# Altium PCB bmsSlave.PcbDoc (part 2 of 2)
Units mil, origin at the board's own origin, x right, y up, seen from the top; angles counter-clockwise.
Board outline 5031.62 x 7216.44 mil, 2 copper layers (Top Layer, Bottom Layer); 233 components, 161 nets, 594 pads, 117 vias.
Unrouted connection lines stored in the file: 5.
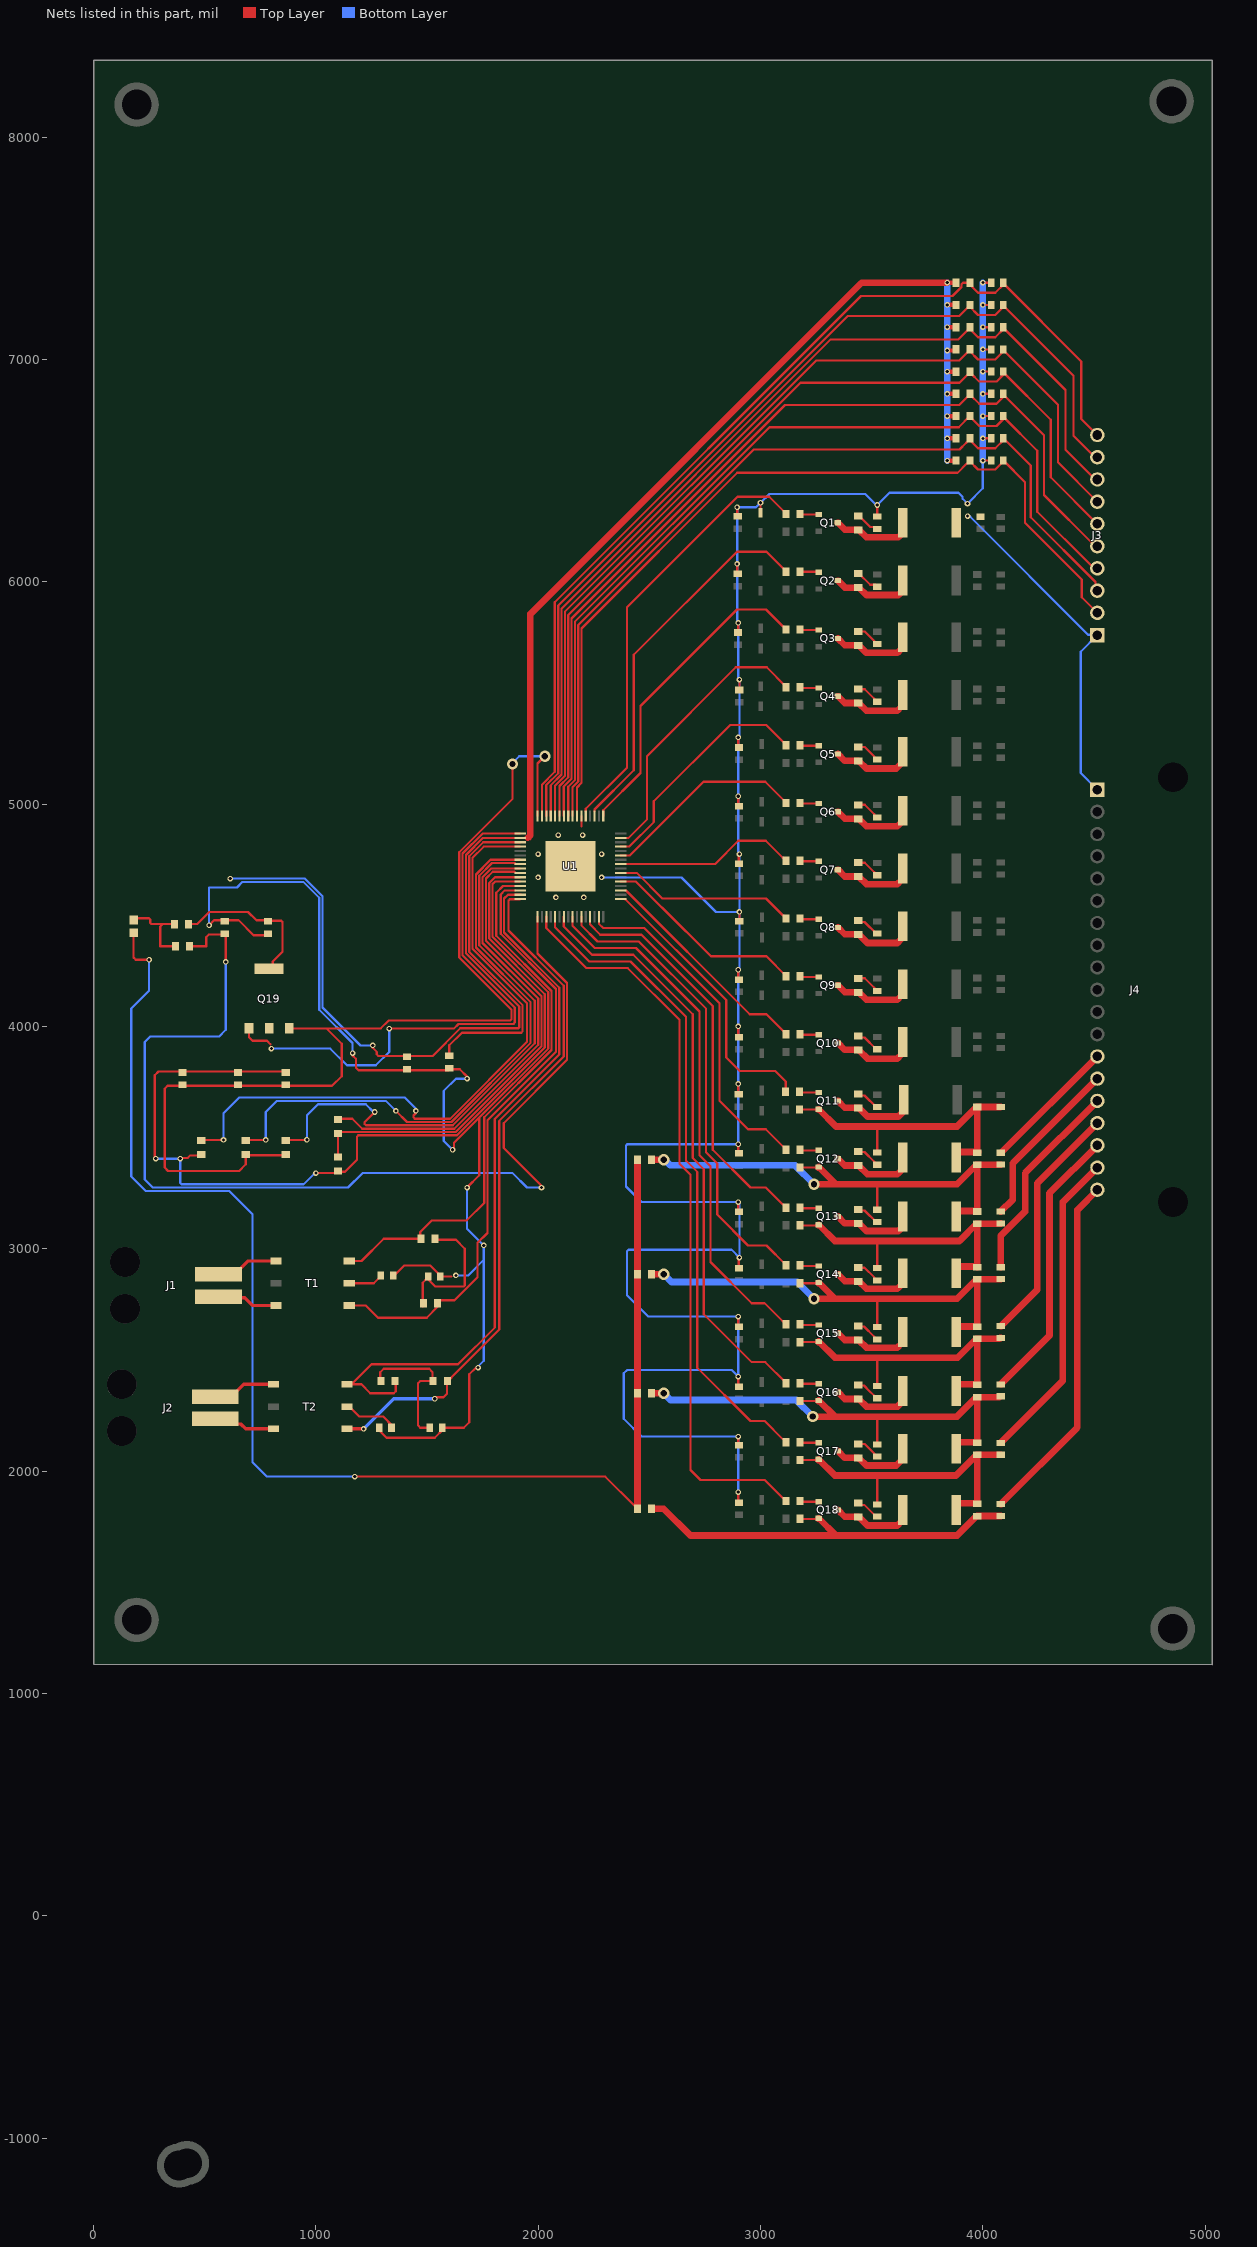
[diagram p2: the nets of this part, all layers, seen from the top]

## Via types
v1: diameter 25, hole 14, Top Layer to Bottom Layer, tented both sides, 109 vias
v2: diameter 50, hole 28, Top Layer to Bottom Layer, tented both sides, 8 vias

## Nets (pads, with @x,y where several pads share a name; then routed paths per layer and width w, separated by ;. In a path a pad name is that pad's centre, name@x,y a point inside that pad or via, vN(x,y) a via of type N, cw(c..) or ccw(c..) an arc to the next point about the centre after c; other vN are vias at no path point) (continued)
Cell11_F: C30.1 C34.2 F11.2 LED12.1 Q11.2 R65.2 R67.2 | length 1383.5
  Top Layer w10: R67.2@3176.29,3626.48 Q11.2@3260.57,3626.48 ; LED12.1@3525,3432.56 3525,3550
  Top Layer w30: Q11.2@3260.57,3626.48 Q11.2@3261.69,3627.6 3339.29,3550 3525,3550 3884.29,3550 3971.73,3637.44 C34.2@3975,3637.44 ; R65.2@3890.87,3435 C30.1@3979.13,3435 ; C30.1@3975,3432.56 C34.2@3975,3637.44 ; F11.2@4080,3638.25 4079.43,3637.68 3975.24,3637.68 C34.2@3975,3637.44
Cell12: F12.1 J4.13 | length 614.8
  Top Layer w30: F12.1@4080,3431.75 4082.25,3431.75 4515,3864.5 J4.13@4515,3865
Cell12_F: C25.1 C30.2 F12.2 LED13.1 Q12.2 R56.2 R59.2 R91.1 | length 2261.2
  Top Layer w10: R59.2@3176.5,3365 Q12.2@3259.09,3365 ; LED13.1@3525,3175.12 3525,3290
  Top Layer w30: R91.1@2510,3400 v2(2565,3400) ; v2(3240,3290) 3339.29,3290 ; Q12.2@3259.09,3365 Q12.2@3261.69,3367.6 3339.29,3290 ; R56.2@3885.87,3170 C25.1@3974.13,3170 ; C25.1@3975,3167.56 C30.2@3975,3377.44 ; F12.2@4080,3378.25 4079.43,3377.68 3975.24,3377.68 C30.2@3975,3377.44 ; 3339.29,3290 3525,3290 3884.29,3290 3971.73,3377.44 C30.2@3975,3377.44
  Bottom Layer w30: v2(2565,3400) 2570,3400 2595,3375 3155,3375 v2(3240,3290)
Cell13: F13.1 J4.14 | length 778.4
  Top Layer w30: F13.1@4080,3166.75 4135,3221.75 4135,3385 J4.14@4515,3765
Cell13_F: C16.1 C25.2 F13.2 LED14.1 Q13.2 R41.2 R45.2 | length 1372.7
  Top Layer w10: R45.2@3176.5,3105 Q13.2@3259.09,3105 ; LED14.1@3525,2912.56 3525,3035
  Top Layer w30: Q13.2@3259.09,3105 Q13.2@3261.69,3107.6 3334.29,3035 3525,3035 3894.29,3035 3971.73,3112.44 C25.2@3975,3112.44 ; R41.2@3885.87,2920 C16.1@3974.13,2920 ; C16.1@3975,2917.56 C25.2@3975,3112.44 ; F13.2@4080,3113.25 4079.43,3112.68 3975.24,3112.68 C25.2@3975,3112.44
Cell14: F14.1 J4.15 | length 928.4
  Top Layer w30: F14.1@4080,2916.75 4080,3056.96 4190,3166.96 4190,3340 J4.15@4515,3665
Cell14_F: C6.1 C16.2 F14.2 LED15.1 Q14.2 R24.2 R28.2 R90.1 | length 2269.2
  Top Layer w10: R28.2@3176.5,2845 Q14.2@3259.09,2845 ; LED15.1@3525,2647.56 3525,2775
  Top Layer w30: R90.1@2510,2885 v2(2565,2885) ; v2(3240,2775) 3334.29,2775 ; Q14.2@3259.09,2845 Q14.2@3261.69,2847.6 3334.29,2775 ; R24.2@3880.87,2650 C6.1@3969.13,2650 ; C6.1@3975,2650 C16.2@3975,2862.44 ; F14.2@4080,2863.25 4079.43,2862.68 3975.24,2862.68 C16.2@3975,2862.44 ; 3334.29,2775 3525,2775 3884.29,2775 3971.73,2862.44 C16.2@3975,2862.44
  Bottom Layer w30: v2(2565,2885) 2600,2850 3165,2850 v2(3240,2775)
Cell15: F15.1 J4.16 | length 1094.8
  Top Layer w30: F15.1@4080,2651.75 4082.25,2651.75 4083.5,2653 4083.5,2655.25 4245,2816.75 4245,3295 J4.16@4515,3565
Cell15_F: C6.2 C22.1 F15.2 LED16.1 Q15.2 R6.2 R57.2 | length 1394.2
  Top Layer w10: R6.2@3176.5,2580 Q15.2@3259.09,2580 ; LED16.1@3525,2382.56 3525,2510
  Top Layer w30: Q15.2@3259.09,2580 Q15.2@3261.69,2582.6 3334.29,2510 3525,2510 3886.85,2510 3971.73,2594.88 C6.2@3975,2594.88 ; R57.2@3875.87,2390 C22.1@3964.13,2390 ; C22.1@3975,2387.56 C6.2@3975,2594.88 ; F15.2@4080,2598.25 4077.75,2598.25 4074.38,2594.88 C6.2@3975,2594.88
Cell16: F16.1 J4.17 | length 1256.5
  Top Layer w30: F16.1@4080,2390 4082.25,2390 4083.5,2391.25 4083.5,2393.5 4300,2610 4300,3250 J4.17@4515,3465
Cell16_F: C13.1 C22.2 F16.2 LED17.1 Q16.2 R42.2 R47.2 R87.1 | length 2258.4
  Top Layer w10: R47.2@3176.5,2315 Q16.2@3259.09,2315 ; LED17.1@3525,2120.12 3525,2245
  Top Layer w30: R87.1@2510,2350 v2(2565,2350) ; v2(3235,2245) 3334.29,2245 ; Q16.2@3259.09,2315 Q16.2@3261.69,2317.6 3334.29,2245 ; R42.2@3880.87,2130 C13.1@3969.13,2130 ; C13.1@3975,2127.56 C22.2@3975,2332.44 ; F16.2@4080,2336.5 4077.75,2336.5 4073.69,2332.44 C22.2@3975,2332.44 ; 3334.29,2245 3525,2245 3884.29,2245 3971.73,2332.44 C22.2@3975,2332.44
  Bottom Layer w30: v2(2565,2350) 2595,2320 3160,2320 v2(3235,2245)
Cell17: F17.1 J4.18 | length 1419.8
  Top Layer w30: F17.1@4080,2126.75 4082.25,2126.75 4083.5,2128 4083.5,2130.25 4360,2406.75 4360,3210 J4.18@4515,3365
Cell17_F: C7.1 C13.2 F17.2 LED18.1 Q17.2 R25.2 R30.2 | length 1411.4
  Top Layer w10: R30.2@3176.5,2050 Q17.2@3259.09,2050 ; LED18.1@3525,1850 3525,1980
  Top Layer w30: Q17.2@3259.09,2050 Q17.2@3261.69,2052.6 3334.29,1980 3525,1980 3879.29,1980 3971.73,2072.44 C13.2@3975,2072.44 ; R25.2@3885.87,1855 C7.1@3974.13,1855 ; C7.1@3975,1852.56 C13.2@3975,2072.44 ; F17.2@4080,2073.25 4079.43,2072.68 3975.24,2072.68 C13.2@3975,2072.44
Cell18: F18.1 J4.19 | length 1594.8
  Top Layer w30: F18.1@4080,1851.75 4082.25,1851.75 4083.5,1853 4083.5,1855.25 4425,2196.75 4425,3175 J4.19@4515,3265
Cell18_F: C7.2 F18.2 Q18.2 R7.2 R84.1 | length 1852.3
  Top Layer w10: R7.2@3176.5,1785 Q18.2@3259.09,1785
  Top Layer w30: R84.1@2510,1830 2565,1830 2685,1710 3339.29,1710 ; Q18.2@3259.09,1785 Q18.2@3261.69,1787.6 3339.29,1710 ; F18.2@4080,1798.25 4079.43,1797.68 3975.24,1797.68 C7.2@3975,1797.44 3971.73,1797.44 3884.29,1710 3339.29,1710
GND: C0.1 C8.1 C9.1 C10.1 C11.1 C12.1 C15.1 C17.1 C18.1 C19.1 C20.1 C21.1 C26.1 C27.1 C28.1 C31.1 C32.1 C35.1 C36.1 C37.2 C38.2 C39.2 C40.2 C41.2 C42.2 C43.2 C44.2 C45.2 C46.2 C47.2 C48.2 C49.2 C50.2 C51.2 C52.2 C53.1 C54.2 C55.1 C56.2 J3.1 J4.1 LED1.1 R46.2 R86.2 R89.1 U1.38 U1.59 U1.60 U1.65 Z1.2 | length 23944.4
  Top Layer w10: v1(280,3405) 275,3410 275,3780 292.28,3797.28 C50.2@865,3797.28 ; v1(390,3405) 393.28,3408.28 423.28,3408.28 434.92,3419.92 R89.1@485,3419.92 ; v1(520,4455) 542.28,4477.28 652.72,4477.28 720,4410 782.28,4410 C38.2@785,4412.72 ; v1(1000,3340) 1094.03,3340 1100,3345.97 1130.97,3345.97 1185,3400 1185,3504.14 1190.86,3510 1635,3510 2030,3905 2030,4145 1780,4395 1780,4645 1805.79,4670.79 U1.59@1918.62,4670.79 ; v1(1165,3880) 1165,3869.18 1180,3854.18 1180,3815 1192.28,3802.72 1595,3802.72 1600,3807.72 1647.28,3807.72 v1@1680,3775 ; C56.2@1280.43,2195 1280.43,2187.13 1317.56,2150 1535.16,2150 1572.28,2187.13 1572.28,2195 1665,2195 1690,2220 1690,2435 1720,2465 v1(1730,2465) ; C54.2@1352.28,2880 1397.28,2925 1514.57,2925 1564.57,2875 1610,2875 ; v1(1615,3445) 1620.78,3450.78 1620.78,3475.78 1735,3590 ; v1(1680,3275) 1735,3330 1735,3590 ; U1.60@1918.62,4651.1 1806.1,4651.1 1795,4640 1795,4403.34 2045,4153.34 2045,3900 1735,3590 ; U1.38@2194.21,4946.38 2194.21,4900.79 2195,4900 ; v1(2895,6080) 2895,6044.57 C18.1@2897.28,6042.28 ; C21.1@2895,6303.71 v1(2895,6335) ; C15.1@2897.9,5773.16 2900,5775.26 v1(2900,5815) ; v1(2899.79,3741.48) 2899.79,3701.04 C36.1@2902.08,3698.76 ; v1(2900,1905) 2900,1867.6 2900.04,1867.56 C11.1@2902.28,1867.56 ; v1@2900,2160 v1(2900,2155) 2900,2124.84 C20.1@2902.28,2122.56 ; v1(2900,2425) 2900,2384.84 C28.1@2902.28,2382.56 ; v1(2900,2695) 2900,2654.84 C10.1@2902.28,2652.56 ; v1(2900,3210) 2900,3174.84 C27.1@2902.28,3172.56 ; v1(2900,3470) 2900,3438.99 2901.71,3437.28 C32.1@2902.28,3437.28 ; v1(2900,4000) 2900,3959.57 C9.1@2902.28,3957.28 ; v1(2900,4255) 2900,4219.57 C17.1@2902.28,4217.28 ; v1(2900,5035) 2900,4999.57 C35.1@2902.28,4997.28 ; v1(2900,5300) 2900,5264.27 2901.98,5262.28 C8.1@2902.28,5262.28 ; C19.1@2902.28,2922.56 2902.28,2957.28 v1(2905,2960) ; C31.1@2902.28,4742.01 2902.28,4772.28 v1(2905,4775) ; C12.1@2903.78,5522.28 2904.41,5522.28 2905,5522.88 v1(2905,5560) ; v1(2905,4515) 2905,4483.43 2906.15,4482.28 C26.1@2909.45,4482.28 ; Z1.2@3000,6323.71 v1(3000,6355) ; LED1.1@3525,6298.71 v1(3525,6345) ; v1(4000,6545) C47.2@4031.29,6545 ; v1(4000,6645) C46.2@4031.29,6645 ; v1(4000,6745) C45.2@4031.29,6745 ; v1(4000,6845) C44.2@4031.29,6845 ; v1(4000,6945) C43.2@4031.29,6945 ; v1(4000,7045) C42.2@4031.29,7045 ; v1(4000,7145) C41.2@4031.29,7145 ; v1(4000,7245) C40.2@4031.29,7245 ; v1(4000,7345) C39.2@4031.29,7345
  Bottom Layer w10: v1(280,3405) 375,3405 ; v1(390,3405) 390,3295.86 395.86,3290 945,3290 v1@990,3335 ; v1(520,4455) 520,4625 645,4625 670,4650 943.79,4650 1015,4578.79 1015,4075 1165,3925 v1(1165,3880) ; 1604.74,3455.26 1575,3485 1575,3710 1630,3765 v1(1680,3765) ; v1(1630,2880) 1685,2880 1755,2950 ; v1@1680,3280 1680,3090 v1(1755,3015) 1755,2950 ; v1(1730,2465) 1730,2471.57 1755,2496.57 1755,2950 ; v1@1755,3010 1755,2950 ; v1(2285,4670) 2645,4670 2800,4515 v1(2905,4515) ; v1(2900,1905) v1(2900,2155) 2465,2155 2385,2235 2385,2440 2400,2455 2870,2455 v1(2900,2425) v1(2900,2695) 2495,2695 2400,2790 2400,2989.14 2405.86,2995 2870,2995 v1(2905,2960) 2905,3200.94 2900,3205.94 v1(2900,3210) 2465,3210 2395,3280 2395,3464.14 2400.86,3470 v1(2900,3470) 2899.9,3470.1 2899.9,3741.37 v1(2899.79,3741.48) 2899.9,3741.58 2899.9,3999.9 v1(2900,4000) v1(2900,4255) 2900,4259.06 2905,4264.06 v1(2905,4515) ; v1(3931.11,6294.88) 3933.98,6292.01 3942.99,6292.01 4473.38,5761.62 4513.38,5761.62 J3.1@4515,5760 4440,5685 4440,5140 J4.1@4515,5065 ; v1(4000,6545) 4000,6420.11 v1(3930.88,6350.98) 3909,6372.86 3909,6381 3890,6400 3580,6400 v1(3525,6345) 3520.94,6345 3470.94,6395 3040,6395 v1(3000,6355) 2980,6335 v1(2895,6335) v1(2895,6080) 2895,5824.06 2900,5819.06 v1(2900,5815) 2900,5569.06 2905,5564.06 v1(2905,5560) 2905,5309.06 2900,5304.06 v1(2900,5300) v1(2900,5035) 2900,4784.06 2905,4779.06 v1(2905,4775) v1(2905,4515)
  Bottom Layer w30: v1(4000,6545) v1(4000,6645) v1(4000,6745) v1(4000,6845) v1(4000,6945) v1(4000,7045) v1(4000,7145) v1(4000,7245) v1(4000,7345)
  other v1: 2080,4580 2205,4580 2000,4670 2000,4775 2285,4775 2090,4860 2200,4860
GPIO1: C47.1 J3.2 R83.1 U1.39 | length 3958.2
  Top Layer w10: U1.39@2174.53,4946.38 2174.53,5074.82 2195,5095.29 2195,5790 2895,6490 3886.5,6490 3927.8,6531.3 3930.75,6531.3 R83.1@3941.5,6542.05 ; R83.1@3941.5,6545 R83.1@3941.5,6542.05 ; J3.2@4515,5860 4445,5930 4445,6010 4190,6265 4190,6447.56 C47.1@4092.56,6545 4092.56,6541.26 4056.3,6505 3978.54,6505 R83.1@3941.5,6542.05
GPIO2: C46.1 J3.3 R82.1 U1.40 | length 4030.7
  Top Layer w10: U1.40@2154.84,4946.38 2154.84,5076.35 2180,5101.51 2180,5805 2970,6595 3895,6595 3925,6625 3925,6625.55 3941.5,6642.05 R82.1@3941.5,6645 ; R82.1@3941.5,6637.05 3978.54,6600 4056.3,6600 4092.56,6636.26 C46.1@4092.56,6645 4215,6522.56 4215,6290 4506.43,5998.57 4506.43,5968.57 J3.3@4515,5960
GPIO3: C45.1 J3.4 R81.1 U1.41 | length 4095.8
  Top Layer w10: U1.41@2135.16,4946.38 2135.16,5077.88 2165,5107.72 2165,5820 3040,6695 3891.5,6695 R81.1@3941.5,6745 ; R81.1@3946.5,6737.05 3983.54,6700 4061.3,6700 C45.1@4097.56,6736.26 ; C45.1@4092.56,6745 4092.56,6741.26 C45.1@4097.56,6736.26 ; J3.4@4515,6060 4500.13,6060 4484.05,6076.07 4483.93,6076.07 4245,6315 4245,6588.82 C45.1@4097.56,6736.26
GPIO4: C44.1 J3.5 R80.1 U1.42 | length 4161.8
  Top Layer w10: U1.42@2115.47,4946.38 2115.47,5079.41 2150,5113.93 2150,5835 3110,6795 3894.45,6795 3941.5,6842.05 R80.1@3941.5,6845 ; R80.1@3946.5,6837.05 3983.54,6800 4061.3,6800 C44.1@4097.56,6836.26 ; C44.1@4092.56,6845 4092.56,6841.26 C44.1@4097.56,6836.26 ; J3.5@4515,6160 4505,6160 4274.78,6390.22 4274.78,6659.04 C44.1@4097.56,6836.26
GPIO5: C43.1 J3.6 R79.1 U1.43 | length 4223.4
  Top Layer w10: U1.43@2095.79,4946.38 2095.79,5080.93 2135,5120.15 2135,5850 3180,6895 3895,6895 3925,6925 3925,6925.55 3941.5,6942.05 R79.1@3941.5,6945 ; R79.1@3946.5,6937.05 3983.54,6900 4061.3,6900 C43.1@4097.56,6936.26 ; C43.1@4092.56,6945 4092.56,6941.26 C43.1@4097.56,6936.26 ; J3.6@4515,6260 4305.52,6469.48 4305.52,6728.3 C43.1@4097.56,6936.26
GPIO6: C42.1 J3.7 R78.1 U1.44 | length 4286.2
  Top Layer w10: U1.44@2076.1,4946.38 2076.1,5082.46 2120,5126.36 2120,5864.53 3250.47,6995 3894.45,6995 3941.5,7042.05 R78.1@3941.5,7045 ; R78.1@3941.5,7037.05 3978.54,7000 4056.3,7000 C42.1@4092.56,7036.26 ; C42.1@4092.56,7041.26 4338.24,6795.58 4338.24,6536.76 J3.7@4515,6360
GPIO7: C41.1 J3.8 R77.1 U1.45 | length 4362.9
  Top Layer w10: U1.45@2056.42,4946.38 2056.42,5083.99 2105,5132.57 2105,5878.92 3316.08,7090 3890,7090 3925,7125 3925,7125.55 3941.5,7142.05 R77.1@3941.5,7145 ; R77.1@3941.5,7137.05 3978.54,7100 4056.3,7100 C41.1@4092.56,7136.26 ; C41.1@4092.56,7145 4092.56,7141.26 4371.45,6862.37 4371.45,6593.55 4505,6460 J3.8@4515,6460
GPIO8: C40.1 J3.9 R76.1 U1.46 | length 4425.7
  Top Layer w10: U1.46@2036.73,4946.38 2036.73,5085.52 2090,5138.79 2090,5892.95 3392.05,7195 3894.45,7195 3941.5,7242.05 R76.1@3941.5,7245 ; R76.1@3941.5,7237.05 3978.54,7200 4056.3,7200 C40.1@4092.56,7236.26 ; C40.1@4092.56,7241.26 4407.64,6926.18 4407.64,6656.82 4504.45,6560 J3.9@4515,6560
GPIO9: C39.1 J3.10 R75.1 U1.47 | length 4495.9
  Top Layer w10: U1.47@2017.05,4946.38 2017.05,5087.05 2075,5145 2075,5908.12 3452.42,7285.55 3863.4,7285.55 3903.95,7326.1 3903.95,7338.2 3910.75,7345 R75.1@3941.5,7345 ; R75.1@3941.5,7337.05 3978.54,7300 4056.3,7300 C39.1@4092.56,7336.26 ; C39.1@4092.56,7345 4092.56,7341.26 4442.84,6990.98 4442.84,6732.16 J3.10@4515,6660
ISO_Ix_A_N: R95.2 T1.3 U1.61 | length 2477
  Top Layer w10: T1.3@1150,2945 1205,2945 1305,3045 R95.2@1469.08,3045 ; R95.2@1470.92,3045 1470,3045 1470,3075 1522.5,3127.5 1679.22,3127.5 1757.07,3205.36 1757.07,3590.86 2060,3893.79 2060,4159.55 1811.5,4408.05 1811.5,4601.45 1841.79,4631.73 1918.62,4631.73 U1.61@1918.62,4631.42
ISO_Ix_A_P: R94.1 T1.1 U1.62 | length 2711.2
  Top Layer w10: T1.1@1150,2745 1225,2745 1280,2690 1498.6,2690 1548.6,2740 R94.1@1549.52,2740 ; R94.1@1549.52,2760.97 1557.24,2768.7 1624.06,2768.7 1727.5,2872.14 1727.5,3026.39 1772.07,3070.96 1772.07,3577.57 2080,3885.5 2080,4167.84 1831.5,4416.33 1831.5,4593.16 1850.07,4611.73 U1.62@1898.03,4611.73
ISO_Ix_B_N: R97.2 T2.3 U1.63 | length 3271.1
  Top Layer w10: T2.3@1139.96,2390 T2.3@1160,2390 ; R97.2@1359.03,2405 1359.03,2358.79 1350.25,2350 1245,2350 1205,2390 T2.3@1160,2390 ; U1.63@1921.47,4592.36 1864.08,4592.36 1846.5,4574.79 1846.5,4422.55 2095,4174.05 2095,3873.28 1805,3583.28 1805,2645.17 1639.83,2480 1250,2480 T2.3@1160,2390
ISO_Ix_B_P: R96.1 T2.1 U1.64 | length 3110.5
  Top Layer w10: v1(1535,2325) 1541.7,2331.7 1573.91,2331.7 1590,2347.78 1590,2400.97 R96.1@1594.03,2405 ; R96.1@1593.11,2405 1594.95,2405 1609.87,2419.92 1609.87,2421.76 1825,2636.89 1825,3575 2115,3865 2115,4182.34 1866.5,4430.83 1866.5,4566.5 1872.36,4572.36 U1.64@1918.62,4572.36
  Top Layer w15: T2.1@1139.96,2190 v1(1215,2190)
  Bottom Layer w15: v1(1215,2190) 1350,2325 v1(1535,2325)
ISO_xA_A_N: J1.2 T1.4 | length 282.5
  Top Layer w15: J1.2@562.44,2885 634.88,2885 694.88,2945 T1.4@820.08,2945
ISO_xA_A_P: J1.1 T1.6 | length 274.2
  Top Layer w15: J1.1@562.44,2785 568.52,2778.92 681.08,2778.92 715,2745 T1.6@820.08,2745
ISO_xA_B_N: J2.2 T2.4 | length 285.4
  Top Layer w15: J2.2@547.44,2335 619.88,2335 674.88,2390 T2.4@810.04,2390
ISO_xA_B_P: J2.1 T2.6 | length 281.2
  Top Layer w15: J2.1@547.44,2235 570.77,2211.67 663.33,2211.67 685,2190 T2.6@810.04,2190
LTC_IBIAS: R85.2 U1.57 | length 2117.1
  Top Layer w10: R85.2@1100,3585 1163.79,3585 1208.79,3540 1622.57,3540 2000,3917.43 2000,4125 1750,4375 1750,4671.21 1788.94,4710.16 U1.57@1918.62,4710.16
LTC_ICMP: R85.1 R86.1 U1.58 | length 2205.1
  Top Layer w10: R86.1@1100,3415 1100,3515.97 1109.03,3525 1628.79,3525 2015,3911.21 2015,4135 1765,4385 1765,4665 1795.16,4695.16 1893.43,4695.16 1898.11,4690.47 U1.58@1918.62,4690.47
LTC_VIN: FB1.1 R84.2 R87.2 R90.2 R91.2 | length 6320.7
  Top Layer w10: FB1.1@180,4421.06 180,4310 190,4300 v1(250,4300) ; v1(1175,1975) 2302.01,1975 2433.31,1843.7 2436.26,1843.7 2447.01,1832.95 R84.2@2447.01,1830 ; R84.2@2437.01,1836.5 R84.2@2443.5,1830
  Top Layer w30: R84.2@2447.01,1832.95 R87.2@2447.01,2350 R90.2@2447.01,2885 R91.2@2447.01,3400
  Bottom Layer w10: v1(250,4300) 250,4160 170,4080 170,3325 235,3260 610,3260 715,3155 715,2040 780,1975 v1(1175,1975)
LTC_VREF2: C52.1 R75.2 R76.2 R77.2 R78.2 R79.2 R80.2 R81.2 R82.2 R83.2 U1.50 | length 7724.2
  Top Layer w10: v1(1255.78,3914.22) 1255.78,3903.39 1273.79,3885.39 1273.79,3874.35 1280.86,3867.28 1410,3867.28 1525.51,3867.28 1649.8,3991.57 1910,3991.57 1914.39,3995.97 1914.39,4089.39 1675,4328.79 1675,4771.21 1751.74,4847.95 U1.50@1918.62,4847.95
  Top Layer w20: v1(3840,6545) R83.2@3871.29,6545 ; v1(3840,6645) R82.2@3871.29,6645 ; v1(3840,6745) R81.2@3871.29,6745 ; v1(3840,6845) R80.2@3871.29,6845 ; v1(3840,6945) R79.2@3871.29,6945 ; v1(3840,7040) R78.2@3871.29,7040 ; v1(3840,7145) R77.2@3871.29,7145 ; v1(3840,7245) R76.2@3871.29,7245 ; v1(3840,7345) R75.2@3871.29,7345
  Top Layer w30: 1953.49,4847.95 1965,4859.46 1965,5855 3455,7345 v1(3840,7345)
  Bottom Layer w10: v1(615,4665) 950,4665 1030,4585 1030,4085 1200.78,3914.22 v1(1255.78,3914.22)
  Bottom Layer w30: v1(3840,6545) v1(3840,6645) v1(3840,6745) v1(3840,6845) v1(3840,6945) v1(3840,7040) v1(3840,7145) v1(3840,7245) v1(3840,7345)
LTC_VREG: C48.1 C49.1 C50.1 Q19.3 R88.1 R92.1 U1.48 | length 4822.7
  Top Layer w10: R92.1@864.52,3420.48 685,3420.48 685,3380 655,3350 335,3350 320,3365 320,3720 332.72,3732.72 1072.72,3732.72 1116.09,3776.09 1116.09,3921.72 1046.67,3991.14 ; Q19.3@880.55,3991.14 1046.67,3991.14 ; 1879.48,4075.52 1645,4310 1645,4783.64 1885,5023.64 v2(1885,5180) ; 1880,4076.04 1880,4032.12 1874.14,4026.26 1327.37,4026.26 1292.25,3991.14 1046.67,3991.14 ; U1.48@1997.36,4946.38 1997.36,5182.36 v2(2030,5215)
  Bottom Layer w10: v2@1885,5185 1915,5215 v2(2030,5215)
NetC37_1: C37.1 R74.2 U1.1 | length 4952.3
  Top Layer w10: R74.2@434.52,4360 507.28,4360 507.28,4402.28 517.72,4412.72 590,4412.72 595,4407.72 v1(595,4290) ; U1.1@1997.36,4493.62 1997.36,4327.64 2130,4195 2130,3850 1845,3565 1845,3453.36 2012.13,3286.23 2012.13,3273.86 v1@2010,3271.73
  Bottom Layer w10: v1@595,4285 595,3985 565,3955 255,3955 230,3930 230,3311.21 266.21,3275 1145,3275 1210,3340 1885,3340 1950,3275 v1(2015,3275)
NetC38_1: C38.1 Q19.2 Q19.4 R49.2 | length 697.4
  Top Layer w10: R49.2@429.52,4460 465,4460 520,4515 695,4515 732.72,4477.28 785,4477.28 787.28,4475 844.14,4475 850,4469.14 850,4345 849.96,4344.96 849.96,4335.15 806.43,4291.62 806.43,4275.29 Q19.4@790,4258.86
NetC51_1: C51.1 U1.51 | length 1540.2
  Top Layer w10: C51.1@1600,3872.28 1600,3915 1656.89,3971.89 1924.14,3971.89 1930,3977.75 1930,4095 1690,4335 1690,4765 1753.27,4828.27 U1.51@1918.62,4828.27
NetC53_2: C53.2 R94.2 R95.1 | length 644.6
  Top Layer w10: R94.2@1480.48,2740 1480.48,2847.61 C53.2@1500,2867.13 ; C53.2@1500,2875 C53.2@1500,2867.13 ; R95.1@1539.03,3045 1544.03,3040 1630,3040 1670,3000 1670,2835.86 1664.14,2830 1537.13,2830 C53.2@1500,2867.13
NetC54_1: C54.1 T1.2 | length 156.8
  Top Layer w10: T1.2@1150,2845 1260.59,2845 1287.72,2872.13 C54.1@1287.72,2880
NetC55_2: C55.2 R96.2 R97.1 | length 638.4
  Top Layer w10: R97.1@1290,2405 1290,2445 1305,2460 1510,2460 1525,2445 1525,2405 1470,2405 1460,2395 1460,2205 1470,2195 C55.2@1507.72,2195
NetC56_1: C56.1 T2.2 | length 249
  Top Layer w10: T2.2@1139.96,2290 1150,2290 1195,2245 1302.87,2245 1345,2202.87 C56.1@1345,2195
NetFB1_2: FB1.2 R49.1 R74.1 | length 373.3
  Top Layer w10: FB1.2@180,4478.94 187.64,4486.58 249.14,4486.58 255,4480.72 255,4465.86 260.86,4460 310.86,4460 ; R49.1@360.48,4460 310.86,4460 ; R74.1@365.48,4360 300,4360 300,4449.14 310.86,4460
NetLED1_2: LED1.2 R43.2 | length 115
  Top Layer w10: R43.2@3443.94,6292.56 R43.2@3440,6296.5 3442.95,6296.5 3493.23,6246.22 3516.22,6246.22 LED1.2@3525,6237.44
NetLED2_2: LED2.2 R32.2 | length 109.5
  Top Layer w10: R32.2@3440,6036.5 3442.95,6036.5 3493.23,5986.22 3516.22,5986.22 LED2.2@3525,5977.44
NetLED3_2: LED3.2 R20.2 | length 111.3
  Top Layer w10: R20.2@3440,5776.5 3468.5,5776.5 3511.3,5733.7 3511.3,5728.78 3520.08,5720 LED3.2@3525,5720
NetLED4_2: LED4.2 R8.2 | length 111.3
  Top Layer w10: R8.2@3440,5516.5 3468.5,5516.5 3511.3,5473.7 3511.3,5468.78 3520.08,5460 LED4.2@3525,5460
NetLED5_2: LED5.2 R15.2 | length 111.3
  Top Layer w10: R15.2@3440,5256.5 3468.39,5256.5 3511.3,5213.58 3511.3,5208.66 3520.08,5199.88 LED5.2@3525,5199.88
NetLED6_2: LED6.2 R70.2 | length 111.3
  Top Layer w10: R70.2@3440,4996.5 3468.5,4996.5 3511.3,4953.7 3511.3,4948.78 3520.08,4940 LED6.2@3525,4940
NetLED7_2: LED7.2 R62.2 | length 111.3
  Top Layer w10: R62.2@3440,4736.5 3468.5,4736.5 3511.3,4693.7 3511.3,4688.78 3520.08,4680 LED7.2@3525,4680
NetLED8_2: LED8.2 R52.2 | length 109.5
  Top Layer w10: R52.2@3440,4476.5 3446.82,4469.68 3467.84,4469.68 3520.08,4417.44 LED8.2@3525,4417.44
NetLED9_2: LED9.2 R36.2 | length 111.3
  Top Layer w10: R36.2@3440,4216.5 3468.39,4216.5 3511.3,4173.58 3511.3,4168.66 3520.08,4159.88 LED9.2@3525,4159.88
NetLED10_2: LED10.2 R16.2 | length 109.5
  Top Layer w10: R16.2@3440,3956.5 3446.82,3949.68 3467.84,3949.68 3520.08,3897.44 LED10.2@3525,3897.44
NetLED11_2: LED11.2 R71.2 | length 109.5
  Top Layer w10: R71.2@3440,3696.5 3446.82,3689.68 3467.84,3689.68 3520.08,3637.44 LED11.2@3525,3637.44
NetLED12_2: LED12.2 R63.2 | length 112.3
  Top Layer w10: R63.2@3440,3436.5 3441.9,3434.6 3467.84,3434.6 3511.3,3391.14 3511.3,3386.22 3520.08,3377.44 LED12.2@3525,3377.44
NetLED13_2: LED13.2 R53.2 | length 108.4
  Top Layer w10: R53.2@3440,3176.5 3444.26,3172.24 3467.84,3172.24 3520.08,3120 LED13.2@3525,3120
NetLED14_2: LED14.2 R37.2 | length 112.3
  Top Layer w10: R37.2@3440,2916.5 3441.9,2914.6 3467.84,2914.6 3511.3,2871.14 3511.3,2866.22 3520.08,2857.44 LED14.2@3525,2857.44
NetLED15_2: LED15.2 R18.2 | length 110.9
  Top Layer w10: R18.2@3440,2651.5 3441.5,2650 3465,2650 3511.3,2603.7 3511.3,2601.22 3520.08,2592.44 LED15.2@3525,2592.44
NetLED16_2: LED16.2 R54.2 | length 110.9
  Top Layer w10: R54.2@3440,2386.5 3441.5,2385 3465,2385 3488.15,2361.85 3511.3,2338.7 3511.3,2336.22 3520.08,2327.44 LED16.2@3525,2327.44
NetLED17_2: LED17.2 R39.2 | length 111.3
  Top Layer w10: R39.2@3440,2121.5 3468.5,2121.5 3511.3,2078.7 3511.3,2073.78 3520.08,2065 LED17.2@3525,2065
NetLED18_2: LED18.2 R19.2 | length 110.5
  Top Layer w10: R19.2@3440,1856.5 3448.6,1847.9 3467.06,1847.9 3520.08,1794.88 LED18.2@3525,1794.88
NetQ1_1: Q1.1 R1.2 | length 86.3
  Top Layer w10: R1.2@3176.5,6305 3179.09,6302.4 Q1.1@3261.69,6302.4
NetQ1_3: Q1.3 R43.1 R46.1 | length 369.2
  Top Layer w30: Q1.3@3348.31,6265 3379.06,6234.25 3439.25,6234.25 3440.75,6232.76 3443.7,6232.76 3476.46,6200 3620.2,6200 3633.27,6213.07 R46.1@3633.27,6265
NetQ2_1: Q2.1 R29.2 | length 86.3
  Top Layer w10: R29.2@3176.5,6045 3259.09,6045 Q2.1@3261.69,6042.4
NetQ2_3: Q2.3 R32.1 R35.1 | length 372
  Top Layer w30: Q2.3@3348.31,6005 3379.8,5973.5 R32.1@3440,5973.5 3440.75,5972.76 3443.7,5972.76 3476.46,5940 3620.2,5940 3639.92,5959.72 R35.1@3639.92,6005
NetQ3_1: Q3.1 R17.2 | length 84.8
  Top Layer w10: R17.2@3177.99,5785 3180.59,5782.4 Q3.1@3261.69,5782.4
NetQ3_3: Q3.3 R20.1 R23.1 | length 374.3
  Top Layer w30: Q3.3@3348.31,5745 3379.06,5714.25 3439.25,5714.25 3440.75,5712.76 3443.7,5712.76 3476.46,5680 3615.69,5680 3633.27,5697.57 3633.27,5743.35 R23.1@3639.92,5750
NetQ4_1: Q4.1 R5.2 | length 84.8
  Top Layer w10: R5.2@3177.99,5525 3180.59,5522.4 Q4.1@3261.69,5522.4
NetQ4_3: Q4.3 R8.1 R11.1 | length 374.3
  Top Layer w30: Q4.3@3348.31,5485 3379.06,5454.25 3439.25,5454.25 3440.75,5452.76 3443.7,5452.76 3476.46,5420 3615.69,5420 3633.27,5437.57 3633.27,5483.35 R11.1@3639.92,5490
NetQ5_1: Q5.1 R9.2 | length 86.3
  Top Layer w10: R9.2@3176.5,5265 3179.09,5262.4 Q5.1@3261.69,5262.4
NetQ5_3: Q5.3 R15.1 R21.1 | length 376.1
  Top Layer w30: Q5.3@3348.31,5225 3379.06,5194.25 3439.25,5194.25 3440.75,5192.76 3443.7,5192.76 3476.46,5160 3610.2,5160 3639.92,5189.72 R21.1@3639.92,5235
NetQ6_1: Q6.1 R68.2 | length 86.3
  Top Layer w10: R68.2@3176.5,5005 3179.09,5002.4 Q6.1@3261.69,5002.4
NetQ6_3: Q6.3 R70.1 R72.1 | length 374.3
  Top Layer w30: Q6.3@3348.31,4965 3379.06,4934.25 3439.25,4934.25 3440.75,4932.76 3443.7,4932.76 3476.46,4900 3615.69,4900 3633.27,4917.57 3633.27,4963.35 R72.1@3639.92,4970
NetQ7_1: Q7.1 R60.2 | length 86.2
  Top Layer w10: R60.2@3176.5,4744.72 3178.82,4742.4 Q7.1@3261.69,4742.4
NetQ7_3: Q7.3 R62.1 R64.1 | length 374.3
  Top Layer w30: Q7.3@3348.31,4705 3379.06,4674.25 3439.25,4674.25 3440.75,4672.76 3443.7,4672.76 3476.46,4640 3615.69,4640 3633.27,4657.57 3633.27,4703.35 R64.1@3639.92,4710
NetQ8_1: Q8.1 R48.2 | length 84.8
  Top Layer w10: R48.2@3177.99,4485 3180.59,4482.4 Q8.1@3261.69,4482.4
NetQ8_3: Q8.3 R52.1 R55.1 | length 381.4
  Top Layer w30: Q8.3@3348.31,4445 3379.06,4414.25 3439.25,4414.25 3440.75,4412.76 3443.7,4412.76 3481.46,4375 3615.69,4375 3633.27,4392.57 3633.27,4443.35 R55.1@3639.92,4450
NetQ9_1: Q9.1 R31.2 | length 86.3
  Top Layer w10: R31.2@3176.5,4225 3179.09,4222.4 Q9.1@3261.69,4222.4
NetQ9_3: Q9.3 R36.1 R40.1 | length 374.3
  Top Layer w30: Q9.3@3348.31,4185 3379.06,4154.25 3439.25,4154.25 3440.75,4152.76 3443.7,4152.76 3476.46,4120 3615.69,4120 3633.27,4137.57 3633.27,4183.35 R40.1@3639.92,4190
NetQ10_1: Q10.1 R10.2 | length 86.3
  Top Layer w10: R10.2@3176.5,3965 3179.09,3962.4 Q10.1@3261.69,3962.4
NetQ10_3: Q10.3 R16.1 R22.1 | length 381.4
  Top Layer w30: Q10.3@3348.31,3925 3379.06,3894.25 3439.25,3894.25 3440.75,3892.76 3443.7,3892.76 3481.46,3855 3615.69,3855 3633.27,3872.57 3633.27,3923.35 R22.1@3639.92,3930
NetQ11_1: Q11.1 R69.2 | length 87.1
  Top Layer w10: R69.2@3176.29,3706.48 3180.36,3702.4 Q11.1@3261.69,3702.4
NetQ11_3: Q11.3 R71.1 R73.1 | length 386.4
  Top Layer w30: Q11.3@3348.31,3665 3379.06,3634.25 3439.25,3634.25 3440.75,3632.76 3443.7,3632.76 3481.46,3595 3620.69,3595 3638.27,3612.57 3638.27,3663.35 R73.1@3644.92,3670
NetQ12_1: Q12.1 R61.2 | length 86.3
  Top Layer w10: R61.2@3176.5,3445 3179.09,3442.4 Q12.1@3261.69,3442.4
NetQ12_3: Q12.3 R63.1 R65.1 | length 381.4
  Top Layer w30: Q12.3@3348.31,3405 3379.06,3374.25 3439.25,3374.25 3440.75,3372.76 3443.7,3372.76 3481.46,3335 3615.69,3335 3633.27,3352.57 3633.27,3403.35 R65.1@3639.92,3410
NetQ13_1: Q13.1 R50.2 | length 86.3
  Top Layer w10: R50.2@3176.5,3185 3179.09,3182.4 Q13.1@3261.69,3182.4
NetQ13_3: Q13.3 R53.1 R56.1 | length 372
  Top Layer w30: Q13.3@3348.31,3145 3379.06,3114.25 3439.25,3114.25 3440.75,3112.76 3443.7,3112.76 3476.46,3080 3620.2,3080 3639.92,3099.72 R56.1@3639.92,3145
NetQ14_1: Q14.1 R33.2 | length 86.3
  Top Layer w10: R33.2@3176.5,2925 3179.09,2922.4 Q14.1@3261.69,2922.4
NetQ14_3: Q14.3 R37.1 R41.1 | length 374.3
  Top Layer w30: Q14.3@3348.31,2885 3379.06,2854.25 3439.25,2854.25 3440.75,2852.76 3443.7,2852.76 3476.46,2820 3615.69,2820 3633.27,2837.57 3633.27,2883.35 R41.1@3639.92,2890
NetQ15_1: Q15.1 R12.2 | length 86.3
  Top Layer w10: R12.2@3176.5,2660 3179.09,2657.4 Q15.1@3261.69,2657.4
NetQ15_3: Q15.3 R18.1 R24.1 | length 374.3
  Top Layer w30: Q15.3@3348.31,2620 3379.06,2589.25 3439.25,2589.25 3440.75,2587.76 3443.7,2587.76 3476.46,2555 3615.69,2555 3633.27,2572.57 3633.27,2618.35 R24.1@3639.92,2625
NetQ16_1: Q16.1 R51.2 | length 86.3
  Top Layer w10: R51.2@3176.5,2395 3179.09,2392.4 Q16.1@3261.69,2392.4
NetQ16_3: Q16.3 R54.1 R57.1 | length 374.4
  Top Layer w30: Q16.3@3348.31,2355 3379.06,2324.25 3439.25,2324.25 3440.75,2322.76 3443.7,2322.76 3476.46,2290 3615.77,2290 3633.35,2307.57 3633.35,2353.35 R57.1@3640,2360
NetQ17_1: Q17.1 R34.2 | length 86.3
  Top Layer w10: R34.2@3176.5,2130 3179.09,2127.4 Q17.1@3261.69,2127.4
NetQ17_3: Q17.3 R39.1 R42.1 | length 376.1
  Top Layer w30: Q17.3@3348.31,2090 3379.06,2059.25 3439.25,2059.25 3440.75,2057.76 3443.7,2057.76 3476.46,2025 3610.2,2025 3639.92,2054.72 R42.1@3639.92,2100
NetQ18_1: Q18.1 R13.2 | length 86.3
  Top Layer w10: R13.2@3176.5,1865 3179.09,1862.4 Q18.1@3261.69,1862.4
NetQ18_3: Q18.3 R19.1 R25.1 | length 376.4
  Top Layer w30: Q18.3@3348.31,1825 3379.06,1794.25 3439.25,1794.25 3440.75,1792.76 3443.7,1792.76 3481.46,1755 3615.69,1755 3633.27,1772.57 3633.27,1818.35 R25.1@3639.92,1825
NetQ19_1: Q19.1 U1.49 | length 2570.3
  Top Layer w10: Q19.1@699.45,3991.14 699.45,3950.55 715,3935 780,3935 795.52,3919.48 ; v1(1330,3990) 1620,3990 1641.26,4011.26 1889.14,4011.26 1895,4017.12 1895,4085 1660,4320 1660,4777.43 1750.21,4867.64 U1.49@1918.62,4867.64
  Bottom Layer w10: v1(800,3900) 1065,3900 1140,3825 1270,3825 1330,3885 v1(1330,3990)
NetR88_2: R88.2 U1.55 | length 2699.9
  Top Layer w10: R88.2@685,3489.52 v1(774.52,3489.52) v1@775,3490 ; v1(1360,3620) 1410,3570 1610.15,3570 1965.96,3925.82 1965.96,4109.04 1720,4355 1720,4683.64 1785.89,4749.53 U1.55@1918.62,4749.53
  Bottom Layer w10: v1(774.52,3489.52) 774.52,3614.52 825,3665 1315,3665 v1(1360,3620)
NetR89_2: R89.2 U1.52 | length 2998.6
  Top Layer w10: R89.2@485,3489.52 v1(584.52,3489.52) ; v1(1450,3620) 1450,3610 1439.14,3599.14 1439.14,3590.86 1445,3585 1603.93,3585 1950,3931.07 1950,4103.79 1705,4348.79 1705,4758.79 1754.8,4808.58 U1.52@1918.62,4808.58
  Bottom Layer w10: v1(584.52,3489.52) 584.52,3609.52 655,3680 1400,3680 1450,3630 v1(1450,3620)
NetR92_2: R92.2 U1.56 | length 2606.3
  Top Layer w10: R92.2@865,3489.03 959.03,3489.03 v1(960,3490) ; v1(1265,3615) 1219.14,3569.14 1219.14,3560.86 1225,3555 1616.36,3555 1985,3923.64 1985,4115 1735,4365 1735,4677.43 1792.1,4734.53 1893.43,4734.53 1898.11,4729.84 U1.56@1918.62,4729.84
  Bottom Layer w10: v1(960,3490) 960,3600 1010,3650 1224.14,3650 1259.14,3615 v1(1265,3615)
S1: R1.1 U1.37 | length 1949.2
  Top Layer w10: U1.37@2213.98,4966.97 2213.98,4978.83 2400,5164.85 2400,5886.21 2896.29,6382.5 3038.96,6382.5 3113.5,6307.95 R1.1@3113.5,6305
S2: R29.1 U1.35 | length 1692
  Top Layer w10: U1.35@2253.35,4966.97 2253.35,4975.77 2430,5152.43 2430,5671.21 2893.79,6135 3026.46,6135 3113.5,6047.95 R29.1@3113.5,6045
S3: R17.1 U1.33 | length 1437.8
  Top Layer w10: U1.33@2292.64,4946.38 2292.64,4972.64 2460,5140 2460,5441.21 2893.79,5875 3025,5875 3101.3,5798.7 3104.25,5798.7 3115,5787.95 R17.1@3115,5785
S4: R5.1 U1.31 | length 1246.7
  Top Layer w10: U1.31@2391.97,4847.95 2406.74,4847.95 2490,4931.21 2490,5216.21 2888.79,5615 3027.95,5615 3115,5527.95 R5.1@3115,5525
S5: R9.1 U1.29 | length 1062.3
  Top Layer w10: U1.29@2371.38,4808.58 2371.46,4808.66 2409.87,4808.66 2520,4918.79 2520,5012.43 2862.57,5355 3026.46,5355 3102.76,5278.7 3113.5,5267.95 R9.1@3113.5,5265
S6: R68.1 U1.27 | length 920.2
  Top Layer w10: U1.27@2371.38,4769.21 2412.85,4769.21 2550,4906.36 2743.64,5100 3021.46,5100 3113.5,5007.95 R68.1@3113.5,5005
S7: R60.1 U1.25 | length 824.8
  Top Layer w10: U1.25@2371.38,4729.84 2794.84,4729.84 2900,4835 3023.23,4835 3099.8,4758.43 3102.76,4758.43 3113.5,4747.68 R60.1@3113.5,4744.72
S8: R48.1 U1.23 | length 830.5
  Top Layer w10: U1.23@2371.38,4690.47 2443.02,4690.47 2558.49,4575 3025,4575 3101.3,4498.7 3104.25,4498.7 3115,4487.95 R48.1@3115,4485
S9: R31.1 U1.21 | length 920.4
  Top Layer w10: U1.21@2371.38,4651.1 2439.96,4651.1 2556.07,4535 2557.08,4535 2777.08,4315 3026.46,4315 3113.5,4227.95 R31.1@3113.5,4225
S10: R10.1 U1.19 | length 991.1
  Top Layer w10: U1.19@2391.97,4611.65 2395.03,4611.65 2951.68,4055 3026.46,4055 3113.5,3967.95 R10.1@3113.5,3965
S11: R69.1 U1.17 | length 1258.3
  Top Layer w10: U1.17@2391.97,4572.28 2845.38,4118.87 2845.38,3859.62 2905,3800 3065,3800 3113.3,3751.7 R69.1@3113.3,3706.48
S12: R61.1 U1.15 | length 1531.6
  Top Layer w10: U1.15@2273.03,4473.03 2273.03,4461.39 2292.28,4442.14 2477.43,4442.14 2815.38,4104.19 2815.38,3665.83 2943.73,3537.49 3023.97,3537.49 3113.5,3447.95 R61.1@3113.5,3445
S13: R50.1 U1.13 | length 1802.9
  Top Layer w10: U1.13@2233.58,4473.03 2233.58,4458.05 2279.49,4412.14 2465,4412.14 2785.38,4091.76 2785.38,3444.92 2955.31,3275 3023.5,3275 3099.8,3198.7 3102.76,3198.7 3113.5,3187.95 R50.1@3113.5,3185
S14: R33.1 U1.11 | length 2106.5
  Top Layer w10: U1.11@2194.21,4493.62 2194.21,4455 2267.07,4382.14 2452.58,4382.14 2755.38,4079.34 2755.38,3432.5 2805,3382.88 2805,3153.79 2943.79,3015 3026.46,3015 3113.5,2927.95 R33.1@3113.5,2925
S15: R12.1 U1.9 | length 2375.4
  Top Layer w10: U1.9@2154.84,4493.62 2154.84,4451.94 2254.64,4352.14 2440.15,4352.14 2725.38,4066.91 2725.38,3420.07 2775,3370.45 2775,2940 2960,2755 3018.5,2755 3099.8,2673.7 3102.76,2673.7 3113.5,2662.95 R12.1@3113.5,2660
S16: R51.1 U1.7 | length 2656.7
  Top Layer w10: U1.7@2115.47,4493.62 2115.47,4448.88 2242.21,4322.14 2427.72,4322.14 2695.38,4054.49 2695.38,3407.64 2745,3358.03 2745,2705 2960,2490 3021.46,2490 3113.5,2397.95 R51.1@3113.5,2395
S17: R34.1 U1.5 | length 2940.9
  Top Layer w10: U1.5@2076.1,4493.62 2076.1,4445.83 2229.79,4292.14 2415.3,4292.14 2665.38,4042.06 2665.38,3395.22 2715,3345.6 2715,2465 2955,2225 3018.5,2225 3099.8,2143.7 3102.76,2143.7 3113.5,2132.95 R34.1@3113.5,2130
S18: R13.1 U1.3 | length 3354
  Top Layer w10: U1.3@2036.73,4493.62 2036.73,4442.77 2217.36,4262.14 2402.87,4262.14 2635.38,4029.63 2635.38,3382.79 2685,3333.17 2685,2005 2730,1960 3018.5,1960 3099.8,1878.7 3102.76,1878.7 3113.5,1867.95 R13.1@3113.5,1865
pads on no net: J1. J2. J4.MH1 J4.MH2 T1.5 T2.5 U1.53 U1.54

## Polygon pours and split planes (outlines as drawn)
GND on Top Layer "GND_L01_P031" (solid, pour order 31): 1952.35,4822.14 2030,4822.14 2030,4912.38 2336.7,4912.38 2336.7,4528.67 2337.46,4527.92 2336.7,4527.16 1952.62,4527.16
no net on Top Layer "NONET_L01_P032" (solid, pour order 32): 1952.62,4527.16 1952.56,4527.16 1952.23,4527.49 1952.9,4528.15 1952.9,4534.7
GND on Top Layer "GND_L01_P030" (solid, pour order 30): 4010,6265 3860,6265 3860,6385 3970,6385 4010,6345
GND on Bottom Layer "GND_L02_P033" (solid, pour order 33): 4020,7375 4020,6545 3980,6545 3980,7365 3990,7375